# Altium PCB 5V_Power_Supply.PcbDoc
Units mil, origin at the board's own origin, x right, y up, seen from the top; angles counter-clockwise.
Board outline 6000 x 4000 mil, 2 copper layers (Top Layer, Bottom Layer); 9 components, 7 nets, 21 pads, 0 vias.
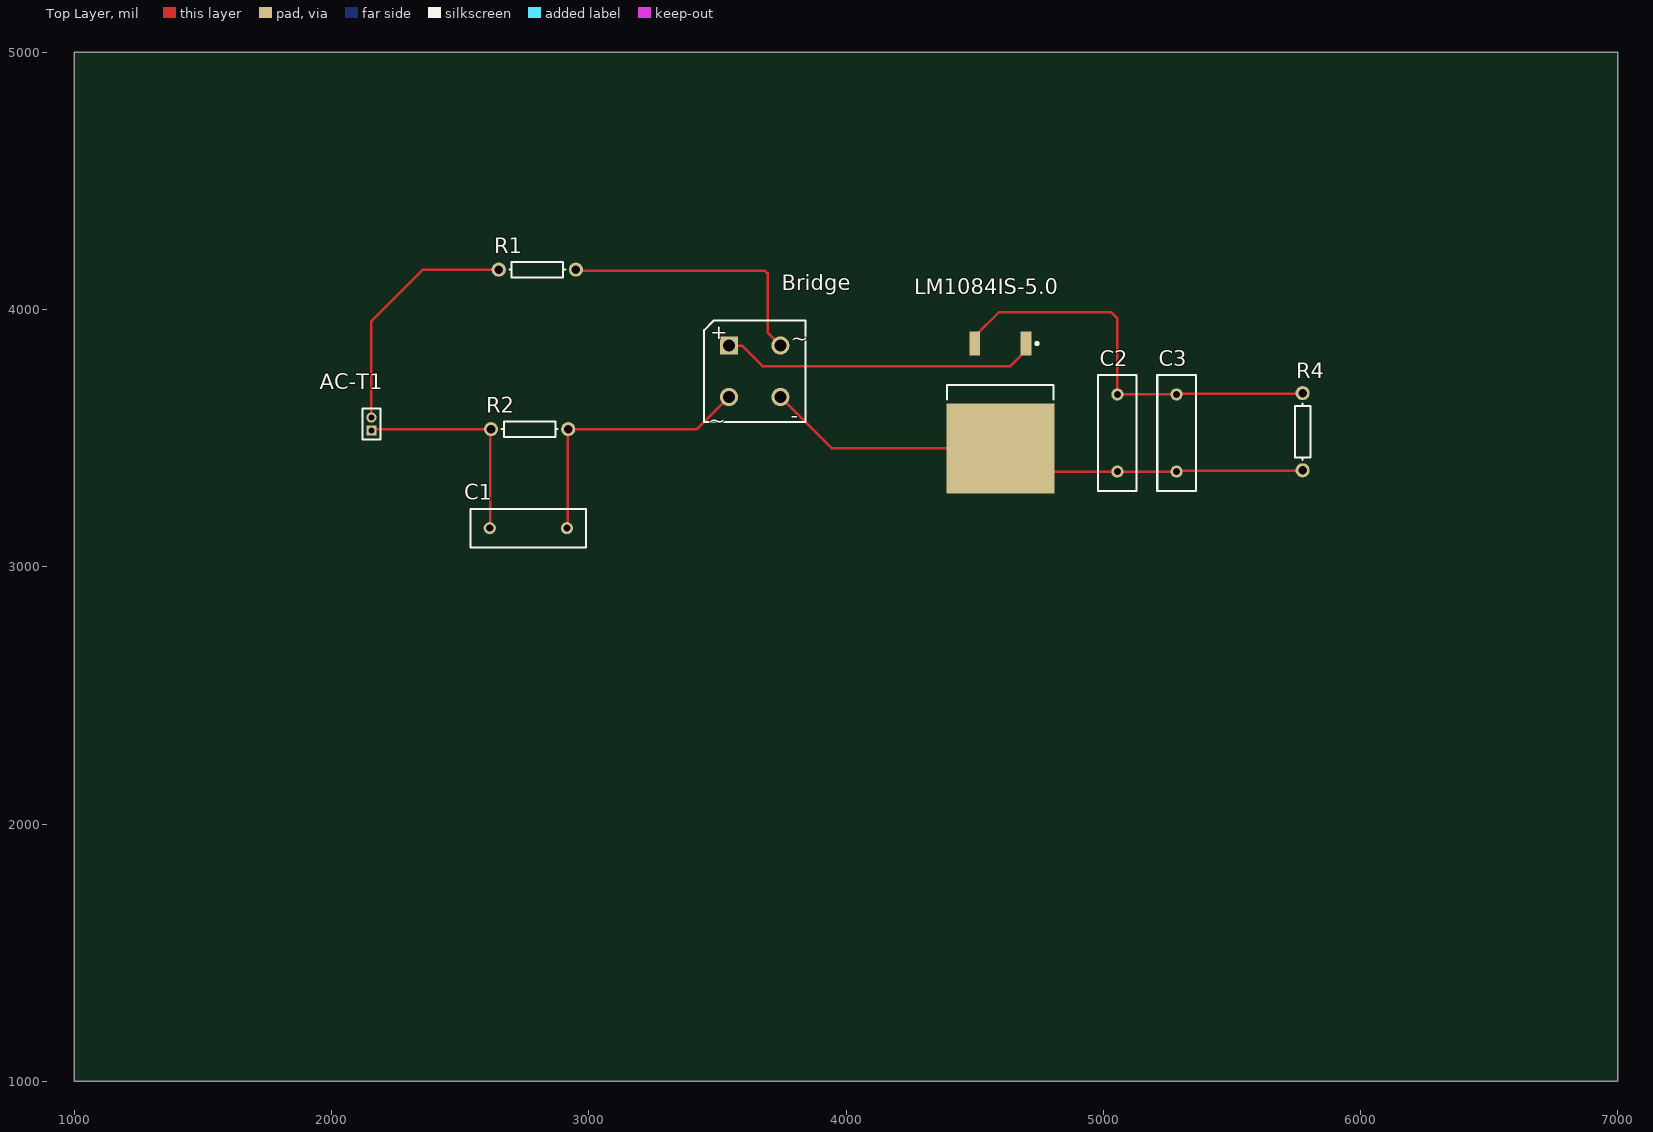
[diagram p0: Top Layer view]
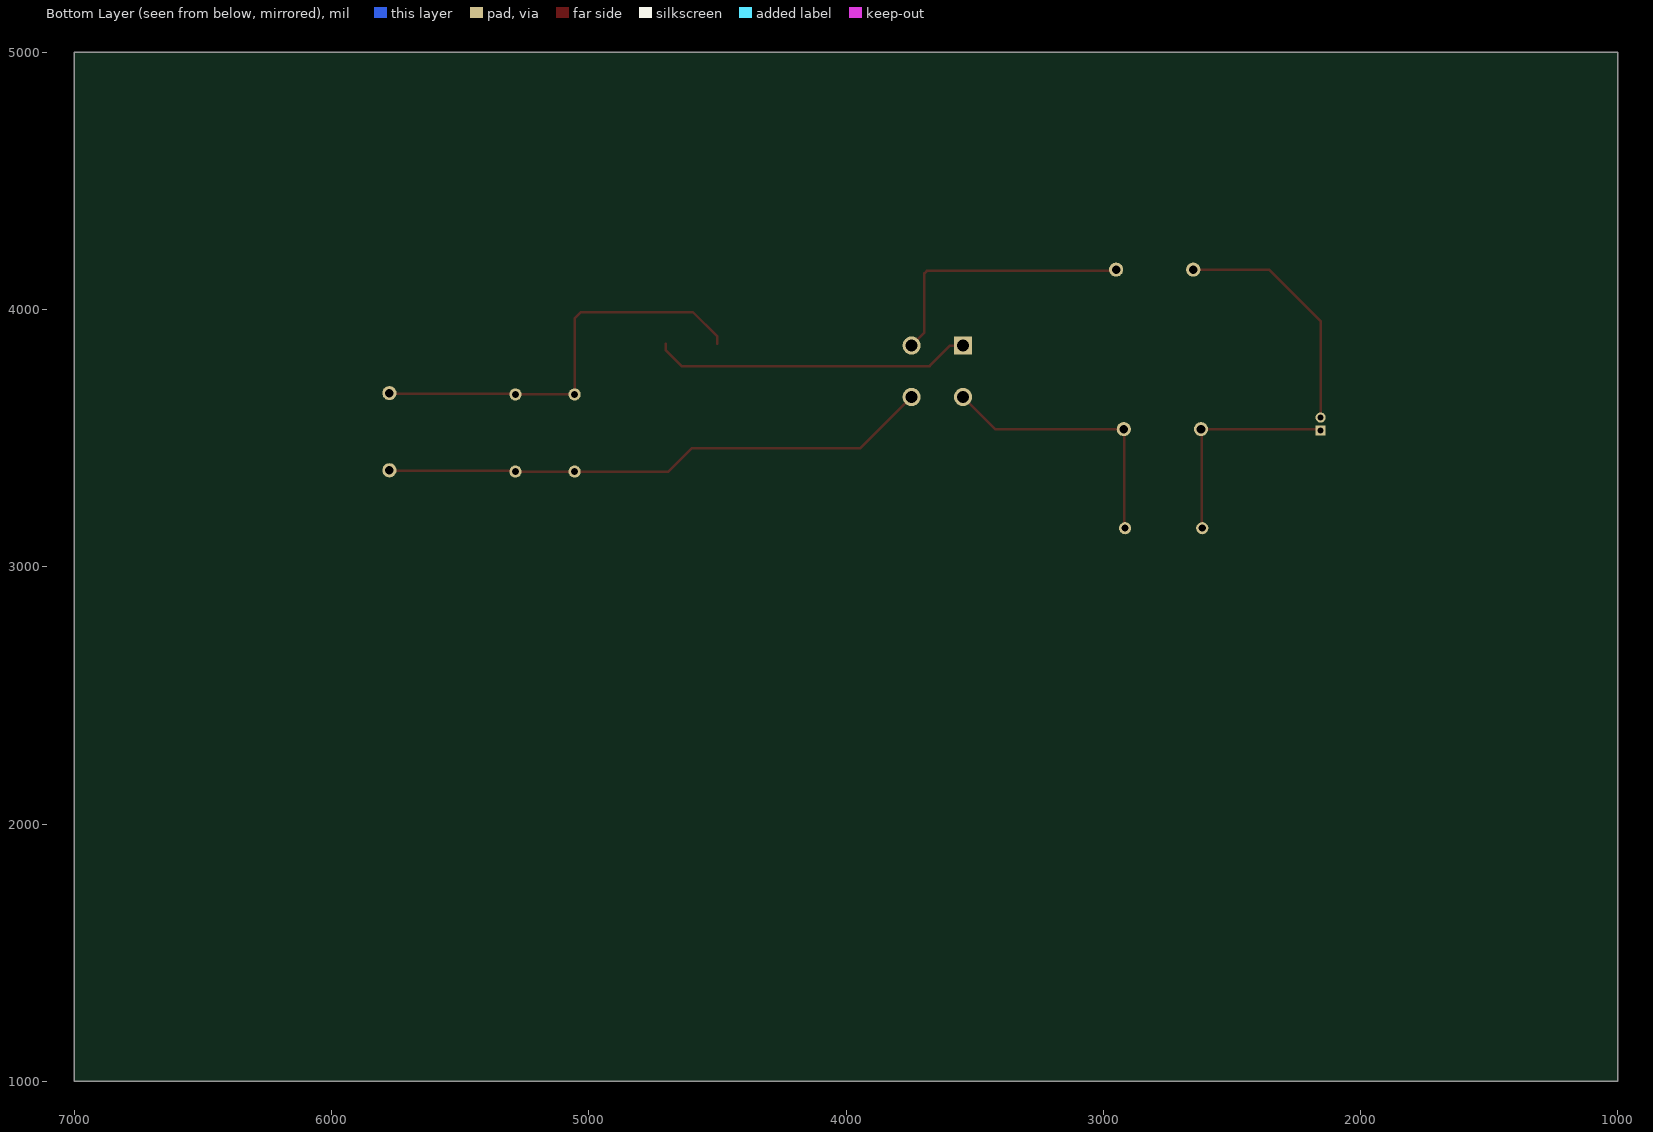
[diagram p1: Bottom Layer view, seen from below]

## Layer stack, top to bottom
Top Solder: solder mask 0.4, Solder Resist, Dk 3.5
Top Layer: signal copper 1.4
Dielectric 1: dielectric 12.6, FR-4, Dk 4.8
Bottom Layer: signal copper 1.4
Bottom Solder: solder mask 0.4, Solder Resist, Dk 3.5

## Board outline
1000,1000 7000,1000 7000,5000 1000,5000

## Design rules (kind name [scope] priority, off if disabled: settings)
Clearance [All] p1: gap=10 ignorepadtopadclearanceinfootprint=FALSE
PolygonConnect [All] p1: connectstyle=Relief reliefconductorwidth=10 reliefentries=4 polygonreliefangle="90 Angle" airgapwidth=10
RoutingVias [All] p1: holewidth=28 width=50 viastyle="Through Hole" minholewidth=28 minwidth=50 maxholewidth=28 maxwidth=50
SolderMaskExpansion [All] p1: expansion=0 istentingtop=FALSE
SupplyNets "Schematic Supply Nets" [InNet('GND')] p1: voltage=0.000
Width [All] p1: maxlimit=10 minlimit=10 preferedwidth=10
30 further rules are at their usual default settings.

## Components (designator, comment, footprint, x,y, rotation, side; value= is the part's Value field where it differs from the comment)
AC-T1 "" MHDR1X2 2155,3530 r90 top
Bridge "Bridge1" D-38 3645,3760 r0 top (schematic designator D1)
C1 "" RAD-0.3 2765,3150 r180 top value=470uF
C2 "Electrolytic" RAD-0.3 5055,3520 r90 top value=470uF
C3 "ceramic" RAD-0.3 5285,3520 r90 top value=0.1uF
LM1084IS-5.0 "Volt Reg 5V" D2PAK_N 4600,3600 r270 top
R1 "" AXIAL-0.3 2800,4155 r180 top value=10m
R2 "" AXIAL-0.3 2770,3535 r180 top value=1m
R4 "OUT" AXIAL-0.3 5775,3525 r90 top value=10K

## Footprints (in the part's own frame and the unit in brackets; to place one, negate y for a bottom-side part, rotate by r counter-clockwise, add the part's x,y. Pads: shape width x height; smd on the part's side, far side on the other; paste and mask are expansions set on the pad)
AXIAL-0.3 [mm] "Axial Device, Thru-Hole; 2 Leads; 0.3 in Pin Spacing"
  round 1.4 hole 0.85: 1(-3.81,0) 2(3.81,0)
  silkscreen extent -2.77,-0.76 2.77,0.76
D2PAK_N [mm] "D2-PAK, 4-Leads, Body 8.8x10.4mm, Pitch 2.54mm, Lead Span 15.1mm, IPC Medium Density"
  rect 2.4x1.05 smd: 1(-6.8,2.54) 3(-6.8,-2.54)
  rect 8.9x10.65 smd: 2(3.55,0)
  silkscreen extent -6.92,-5.25 -1.3,5.25, body extent -2.7,-5.28 6.3,5.28, height 4.69
D-38 [mm] "Bridge Rectifier; 4 Terminals; Body 9.4 x 9.4 mm (typ); Pitch 5.08 mm"
  rect 1.8x1.8 hole 1.2: 1(-2.54,2.54)
  round 1.8 hole 1.2: 2(-2.54,-2.54) 3(2.54,-2.54) 4(2.54,2.54)
  silkscreen extent -5,-5 5,5, body extent -5,-5 5,5, height 9.91
MHDR1X2 [mm] "Connector; Header; 2 Position"
  rect 1x1 hole 0.6: 1(0,0)
  round 1 hole 0.6: 2(1.27,0)
  silkscreen extent -0.9,-0.9 2.17,0.9
RAD-0.3 [mm] "Radial Cap, Thru-Hole; 2 Leads; 0.3 in Pin Spacing"
  round 1.2 hole 0.7: 1(-3.81,0) 2(3.81,0)
  silkscreen extent -5.71,-1.91 5.71,1.91

## Part data
AC-T1: library part MHDR1X2, "Header, 2-Pin", LatestRevisionDate=17-Jul-2002, LatestRevisionNote="Re-released for DXP Platform.", Publisher="Altium Limited"
Bridge: "Full Wave Diode Bridge", DatasheetVersion=E2732B, LatestRevisionDate=29-May-2009, LatestRevisionNote="Sch pins A & K swapped.", PackageDescription="Bridge Rectifier; 4 Terminals; Body 9.4 x 9.4 mm (typ); Pitch 5.08 mm", PackageReference=D-38, Published=8-Jun-2000, Publisher="Altium Limited"
C1 C2 C3: library part Cap, "Capacitor", LatestRevisionDate=17-Jul-2002, LatestRevisionNote="Re-released for DXP Platform.", PackageDescription="Radial Cap, Thru-Hole; 2 Leads; 0.3 in Pin Spacing", PackageReference=RAD-0.3, Published=8-Jun-2000, Publisher="Altium Limited"
LM1084IS-5.0: library part "Volt Reg", "Voltage Regulator", LatestRevisionDate=29-May-2009, LatestRevisionNote="IPC-7351 Footprint Added.", PackageDescription="3-Pin Transistor Outline Package 2.54 mm Pitch, 15.1 mm Lead Span", PackageReference=D2PAK, Published=24-Mar-1999, Publisher="Altium Limited"
R1 R2 R4: library part Res1, "Resistor", LatestRevisionDate=17-Jul-2002, LatestRevisionNote="Re-released for DXP Platform.", PackageDescription="Axial Device, Thru-Hole; 2 Leads; 0.3 in Pin Spacing", PackageReference=AXIAL-0.3, Published=8-Jun-2000, Publisher="Altium Limited"

## Nets (pads, with @x,y where several pads share a name; then routed paths per layer and width w, separated by ;. In a path a pad name is that pad's centre, name@x,y a point inside that pad or via, vN(x,y) a via of type N, cw(c..) or ccw(c..) an arc to the next point about the centre after c; other vN are vias at no path point)
GND: Bridge.3 C2.1 C3.1 LM1084IS-5.0.2 R4.1 | length 2152.2
  Top Layer w10: Bridge.3 3944.76,3460.24 LM1084IS-5.0.2 4690.24,3370 C2.1 C3.1 5287.5,3372.5 5772.5,3372.5 R4.1
NetAC-T1_1: AC-T1.1 C1.2 R2.2 | length 854.1
  Top Layer w10: AC-T1.1 2160,3535 R2.2 2617.5,3532.5 2617.5,3152.5 C1.2
NetAC-T1_2: AC-T1.2 R1.2 | length 952.8
  Top Layer w10: AC-T1.2 2155,3955 2355,4155 R1.2
NetC1_1: Bridge.2 C1.1 R2.1 | length 1063.8
  Top Layer w10: C1.1 2917.5,3152.5 2917.5,3532.5 R2.1 3420,3535 Bridge.2
NetC2_2: C2.2 C3.2 LM1084IS-5.0.3 R4.2 | length 1648.6
  Top Layer w10: LM1084IS-5.0.3 4500,3894.29 4595.71,3990 5030,3990 5055,3965 C2.2 C3.2 5287.5,3672.5 5772.5,3672.5 R4.2
NetD1_1: Bridge.1 LM1084IS-5.0.1 | length 1240
  Top Layer w10: Bridge.1 3595,3860 3675,3780 4638.86,3780 4700,3841.14 LM1084IS-5.0.1
NetD1_4: Bridge.4 R1.1 | length 1054.9
  Top Layer w10: R1.1@2945,4150 3685,4150 3695,4140 3695,3910 Bridge.4

## Text inside footprints (layer, text, board x,y; h text height)
Bridge: Top Overlay "+" at 3471.38,3884.57 h59.06; Top Overlay "-" at 3785,3560 h59.05; Top Overlay "~" at 3465,3540 h59.05; Top Overlay "~" at 3785,3860 h59.05